# Altium PCB Copy of Breakout pcb.PcbDoc
Units mil, origin at the board's own origin, x right, y up, seen from the top; angles counter-clockwise.
Board outline 2910 x 1805 mil, 4 copper layers (Top Layer 1, Top Layer, Bottom Layer, Bottom Layer 1), stack 23.756 mil thick; 2 components, 34 nets, 72 pads, 16 vias.
Unrouted connection lines stored in the file: 16.
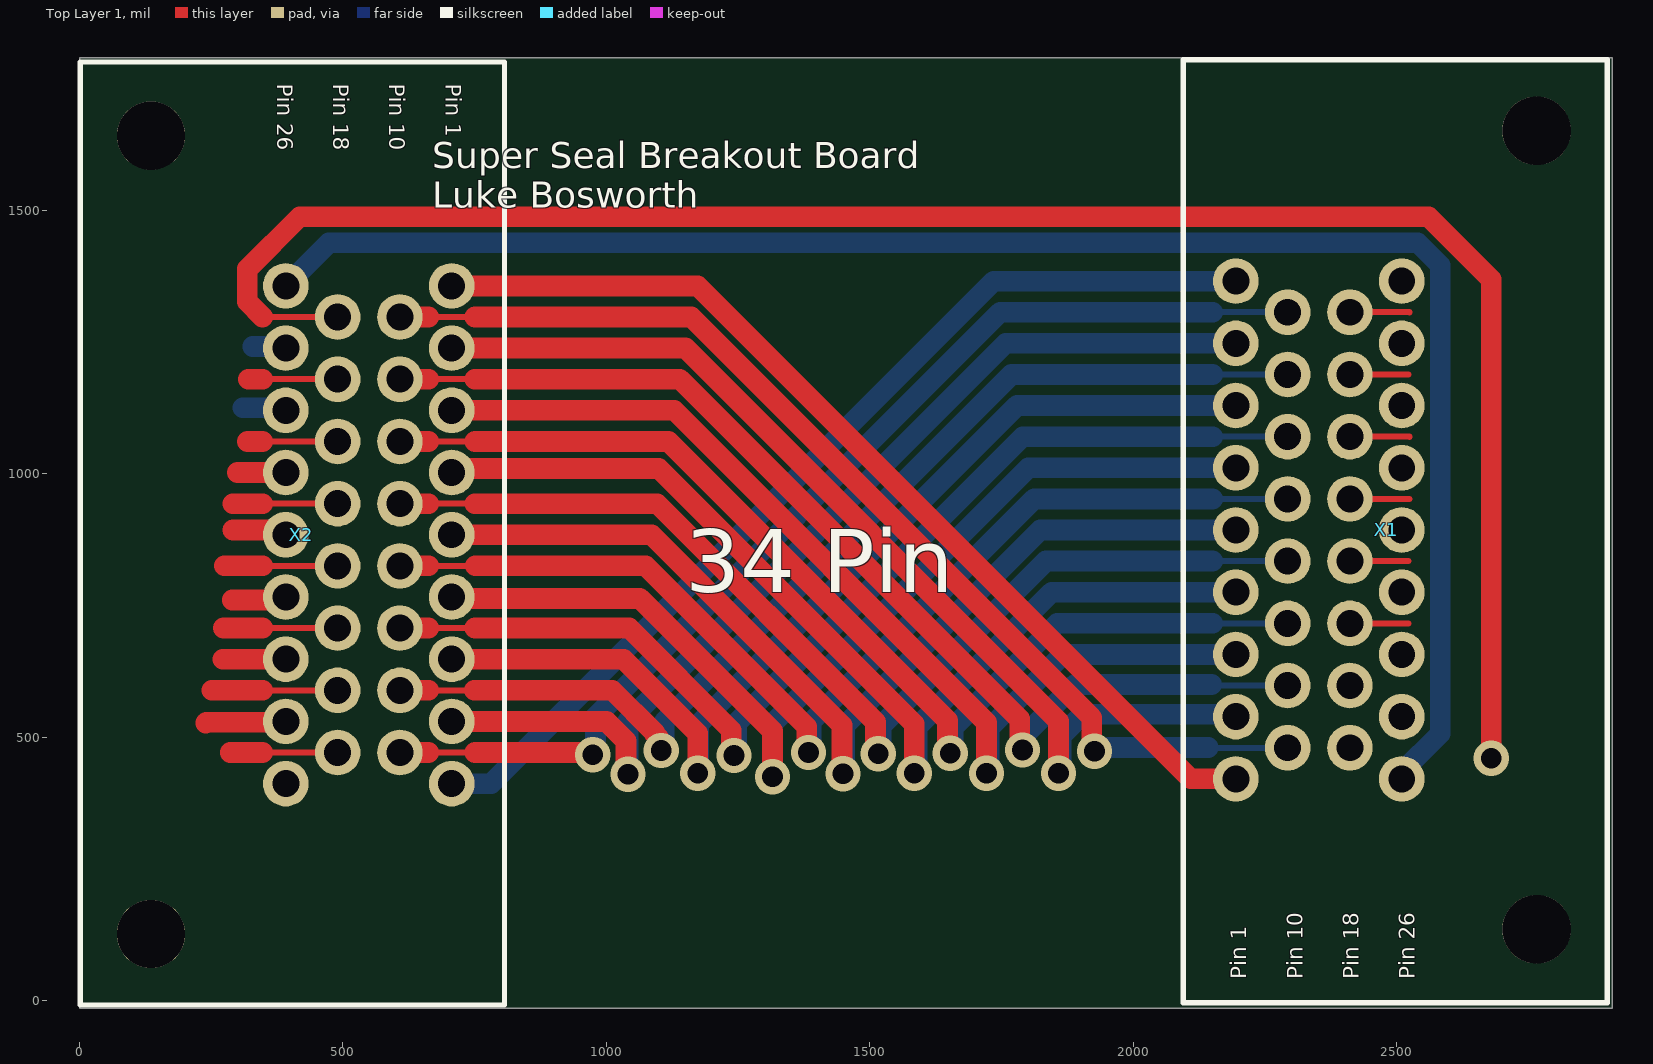
[diagram p0: Top Layer 1 view]
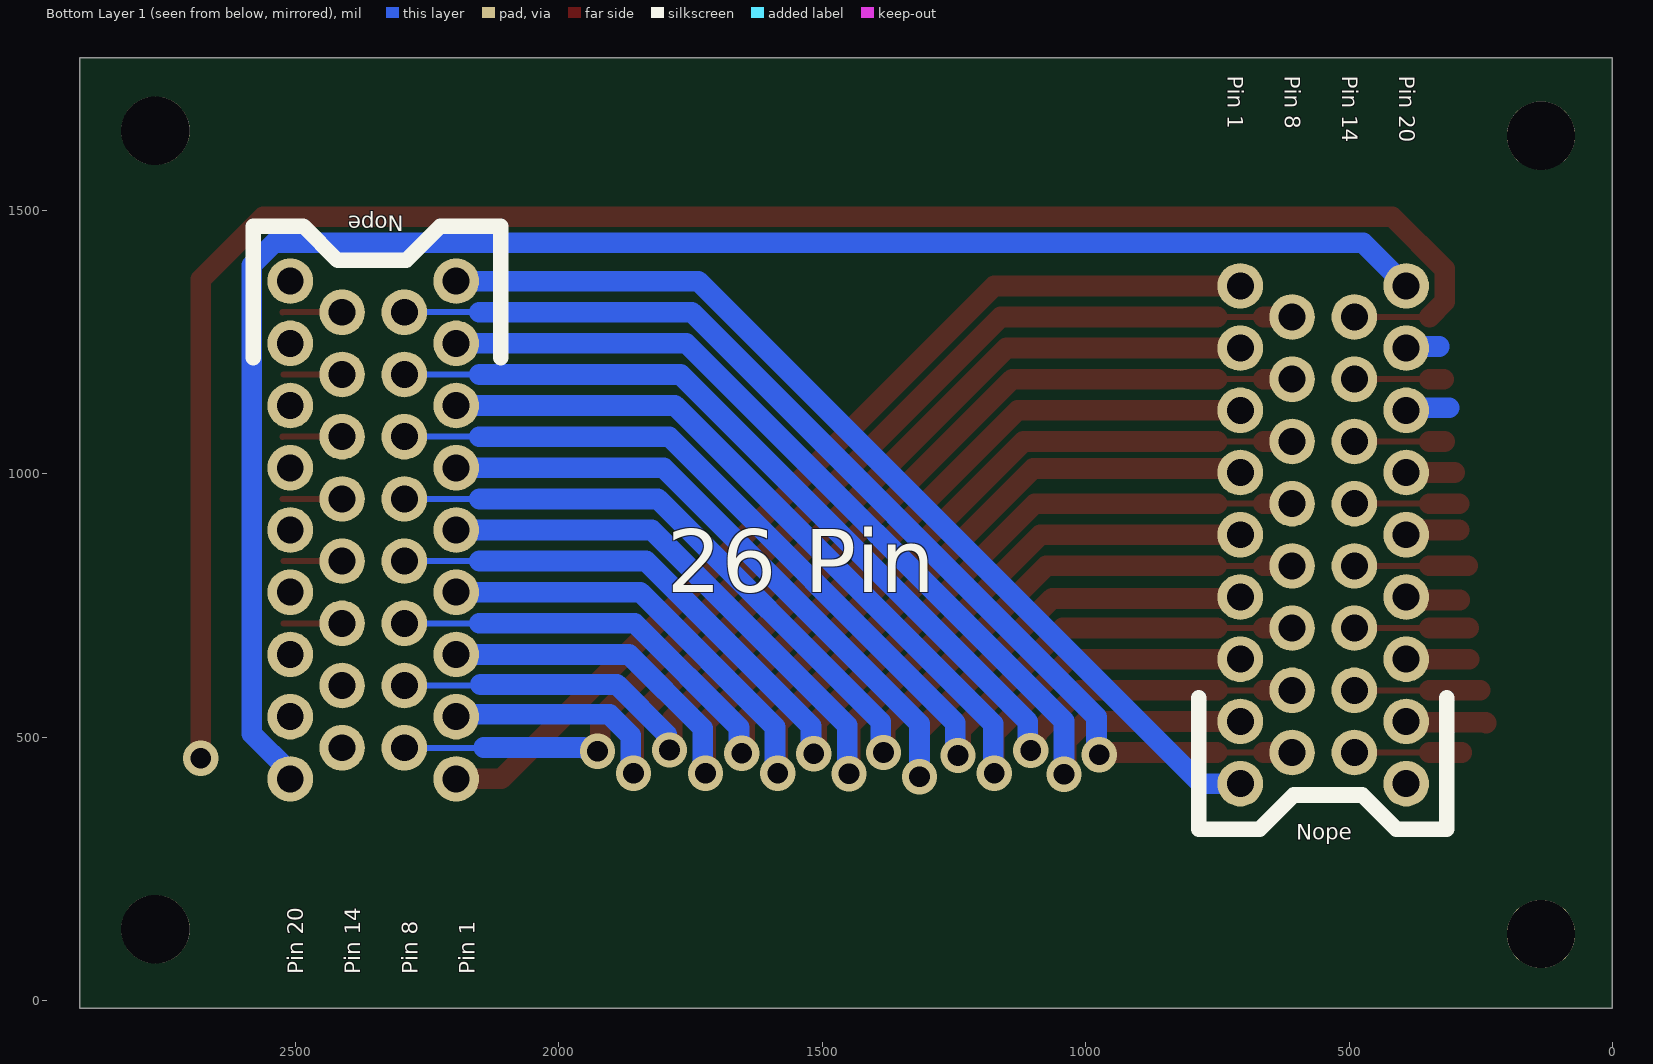
[diagram p1: Bottom Layer 1 view, seen from below]

## Layer stack, top to bottom
Top Solder: solder mask 0.4, Solder Resist, Dk 3.5
Top Layer 1: signal copper 1.378
Dielectric 2: prepreg 2.8, PP-006, Dk 4.1
Top Layer: signal copper 1.4
Dielectric 1: dielectric 12.6, FR-4, Dk 4.8
Bottom Layer: signal copper 1.4
Dielectric 3: prepreg 2.8, PP-006, Dk 4.1
Bottom Layer 1: signal copper 1.378
Bottom Solder: solder mask 0.4, Solder Resist, Dk 3.5

## Board outline
0,-15 2910,-15 2910,1790 0,1790

## Design rules (kind name [scope] priority, off if disabled: settings)
Clearance [All] p1: gap=10 ignorepadtopadclearanceinfootprint=FALSE except(0: Arc-Hole Track-Hole SMDPad-Hole THPad-Hole Via-Hole Fill-Hole Poly-Hole Region-Hole Text-Hole)
Height [All] p1: minheight=0 maxheight=1500 prefheight=500
HoleSize [All] p1: absolutevalues=TRUE maxlimit=150 minlimit=11.81 maxpercent=80.000 minpercent=20.000
PolygonConnect [All] p1: connectstyle=Relief reliefconductorwidth=10 reliefentries=4 polygonreliefangle="90 Angle" airgapwidth=10
RoutingVias [All] p1: holewidth=11.81 width=19.68 viastyle="Through Hole" minholewidth=11.81 minwidth=19.68 maxholewidth=78.74 maxwidth=78.74
SolderMaskExpansion [All] p1: expansion=4 istentingtop=FALSE
Width [All] p1: maxlimit=39.37 minlimit=5 preferedwidth=15
28 further rules are at their usual default settings.

## Components (designator, comment, footprint, x,y, rotation, side; value= is the part's Value field where it differs from the comment)
X1 "6437288-1" 6437288-1 2195.04,420.67 r90 top
X2 "6437288-1" 6437288-1 706.54,1356.5 r270 top

## Footprints (in the part's own frame and the unit in brackets; to place one, negate y for a bottom-side part, rotate by r counter-clockwise, add the part's x,y. Pads: shape width x height; smd on the part's side, far side on the other; paste and mask are expansions set on the pad)
6437288-1 [mm]
  round 2.2 hole 1.3: A1(0,0) A2(3,0) A3(6,0) A4(9,0) A5(12,0) A6(15,0) A7(18,0) A8(21,0) A9(24,0) A10(1.5,-2.5) A11(4.5,-2.5) A12(7.5,-2.5) A13(10.5,-2.5) A14(13.5,-2.5) A15(16.5,-2.5) A16(19.5,-2.5) A17(22.5,-2.5) A18(1.5,-5.5) A19(4.5,-5.5) A20(7.5,-5.5) A21(10.5,-5.5) A22(13.5,-5.5) A23(16.5,-5.5) A24(19.5,-5.5) A25(22.5,-5.5) A26(0,-8) A27(3,-8) A28(6,-8) A29(9,-8) A30(12,-8) A31(15,-8) A32(18,-8) A33(21,-8) A34(24,-8)
  round 3.3 hole 3.3 unplated: MH(-7.25,-14.5) MH(31.25,-14.5)
  silkscreen extent -10.79,-17.91 34.67,2.54, body extent -10.75,-34 34.75,2.5, height 28.16

## Part data
X1 X2: "Superseal 34P", Circuits=34, ComponentLink1Description=Digikey, ComponentLink1URL=https://www.digikey.com/products/en?mpart=6437288-1&&csp=WT.z_cid%3Dsp_8004_20120425_buynow%26TE_cid%3D8004-1541898693362, Name=6437288-1

## Via types
v1: diameter 66.93, hole 39.37, Top Layer 1 to Bottom Layer 1, tented both sides, 16 vias

## Nets (pads, with @x,y where several pads share a name; then routed paths per layer and width w, separated by ;. In a path a pad name is that pad's centre, name@x,y a point inside that pad or via, vN(x,y) a via of type N, cw(c..) or ccw(c..) an arc to the next point about the centre after c; other vN are vias at no path point)
NetX1_A1: X1.A1 X2.A1 | length 1876.1
  Top Layer 1 w39.37: X2.A1 1173.5,1356.5 2109.33,420.67 X1.A1
NetX1_A2: X1.A2 X2.A2 | length 1967.6
  Top Layer 1 w39.37: X2.A2 1150.35,1238.39 1858.53,530.21 v1(1858.53,431.45)
  Bottom Layer 1 w39.37: v1(1858.53,431.45) 1863.8,436.72 1863.8,503.11 1903.84,543.15 2190.67,543.15 X1.A2
NetX1_A3: X1.A3 X2.A3 | length 1970.4
  Top Layer 1 w39.37: X2.A3 1128.82,1120.28 1721.49,527.61 v1(1721.49,431.45)
  Bottom Layer 1 w39.37: v1(1721.49,431.45) 1726.76,436.72 1726.76,516.76 1866.89,656.89 X1.A3
NetX1_A4: X1.A4 X2.A4 | length 1976.9
  Top Layer 1 w39.37: X2.A4 714.37,1010 1099.46,1010 1584.45,525.01 v1(1584.45,431.45)
  Bottom Layer 1 w39.37: v1(1584.45,431.45) 1589.72,436.72 1589.72,519.36 1845.36,775 X1.A4
NetX1_A5: X1.A5 X2.A5 | length 1972.7
  Top Layer 1 w39.37: X2.A5 1085.76,884.06 1447.33,522.49 1447.33,432.26 v1(1449.3,430.29)
  Bottom Layer 1 w39.37: v1(1449.3,430.29) 1452.68,433.68 1452.68,521.96 1823.83,893.11 X1.A5
NetX1_A6: X1.A6 X2.A6 | length 1982.3
  Top Layer 1 w39.37: X2.A6 709.44,763.04 1063.72,763.04 1315.37,511.38 v1(1315.37,424.75)
  Bottom Layer 1 w39.37: v1(1315.37,424.75) 1315.37,525.19 1801.4,1011.22 X1.A6
NetX1_A7: X1.A7 X2.A7 | length 1965
  Top Layer 1 w39.37: X2.A7 1032.63,647.83 1173.33,507.14 v1(1173.33,431.45)
  Bottom Layer 1 w39.37: v1(1173.33,431.45) 1175.41,433.53 1175.41,524.87 1779.87,1129.33 X1.A7
NetX1_A8: X1.A8 X2.A8 | length 1963.1
  Top Layer 1 w39.37: X2.A8 1000.28,529.72 1037.27,492.73 1037.27,433.34 v1(1041.38,429.24)
  Bottom Layer 1 w39.37: v1(1041.38,429.24) 1041.38,530.48 1758.34,1247.44 X1.A8
NetX1_A9: X1.A9 X2.A9 | length 1883.6
  Bottom Layer 1 w39.37: X2.A9 781.61,411.61 1735.55,1365.55 X1.A9
NetX1_A10: X1.A10 X2.A10 | length 2063.8
  Top Layer 1 w11.4: 662.36,1297.44 730,1297.44 750.71,1297.44
  Top Layer 1 w39.37: X2.A10 662.36,1297.44 ; 750.71,1297.44 1161.12,1297.44 1921.68,536.88 1921.68,478.55 v1(1926.95,473.28)
  Bottom Layer 1 w11.4: 2142.61,480 2142.88,479.72 X1.A10
  Bottom Layer 1 w39.37: v1(1926.95,473.28) 1932.22,478.55 1951.71,478.55 1953.16,480 2142.61,480
NetX1_A11: X1.A11 X2.A11 | length 2075
  Top Layer 1 w11.4: 662.36,1179.33 750.71,1179.33
  Top Layer 1 w39.37: X2.A11 662.36,1179.33 ; 750.71,1179.33 1139.59,1179.33 1784.64,534.28 1784.64,480.75 v1(1789.91,475.48)
  Bottom Layer 1 w11.4: 2148.7,600 2150.82,597.88 2293.42,597.88 X1.A11
  Bottom Layer 1 w39.37: v1(1789.91,475.48) 1795.18,480.75 1795.18,505.18 1890,600 2148.7,600
NetX1_A12: X1.A12 X2.A12 | length 2091.4
  Top Layer 1 w11.4: 662.36,1061.22 750.71,1061.22
  Top Layer 1 w39.37: X2.A12 662.36,1061.22 ; 750.71,1061.22 1118.06,1061.22 1647.6,531.68 1647.6,474.66 v1(1652.87,469.39)
  Bottom Layer 1 w11.4: 2150.87,715.94 X1.A12
  Bottom Layer 1 w39.37: v1(1652.87,469.39) 1658.14,474.66 1658.14,517.96 1856.12,715.94 2150.87,715.94
NetX1_A13: X1.A13 X2.A13 | length 2093.8
  Top Layer 1 w11.4: 662.36,943.11 750.71,943.11
  Top Layer 1 w39.37: X2.A13 662.36,943.11 ; 750.71,943.11 1096.53,943.11 1510.98,528.66 1510.98,473.45 v1(1516.25,468.18)
  Bottom Layer 1 w11.4: 2150.87,834.05 X1.A13
  Bottom Layer 1 w39.37: v1(1516.25,468.18) 1521.52,473.45 1521.52,520.98 1834.6,834.05 2150.87,834.05
NetX1_A14: X1.A14 X2.A14 | length 2070.1
  Top Layer 1 w11.4: 682.09,825.05 750.75,825.05 751.05,825.34
  Top Layer 1 w39.37: X2.A14 662.36,825 ; 751.05,825.34 1074.66,825.34 1380.54,519.46 1380.54,473.76 v1(1383.75,470.56)
  Bottom Layer 1 w11.4: 2150.87,952.17 X1.A14
  Bottom Layer 1 w39.37: v1(1383.75,470.56) 1389.02,475.83 1389.02,529.02 1812.17,952.17 2150.87,952.17
NetX1_A15: X1.A15 X2.A15 | length 2094.7
  Top Layer 1 w11.4: 662.36,706.89 696.78,706.89 750.71,706.89
  Top Layer 1 w39.37: X2.A15 662.36,706.89 ; 750.71,706.89 1043.4,706.89 1237.25,513.04 1237.25,470.35 v1(1242.52,465.08)
  Bottom Layer 1 w11.4: 2150.87,1070.28 2150.92,1070.23 2293.42,1070.23 X1.A15
  Bottom Layer 1 w39.37: v1(1242.52,465.08) 1247.8,470.35 1247.8,527.44 1790.64,1070.28 2150.87,1070.28
NetX1_A16: X1.A16 X2.A16 | length 2069.9
  Top Layer 1 w11.4: 662.36,588.78 750,588.78
  Top Layer 1 w39.37: X2.A16 662.36,588.78 ; 750,588.78 1011.22,588.78 1091.42,508.58 1091.42,506.22 1099.25,498.39 1099.25,479.62 v1(1104.53,474.34)
  Bottom Layer 1 w11.4: 2150.87,1188.39 X1.A16
  Bottom Layer 1 w39.37: v1(1104.53,474.34) 1109.8,479.62 1109.8,529.08 1769.11,1188.39 2150.87,1188.39
NetX1_A17: X1.A17 X2.A17 | length 2073.9
  Top Layer 1 w11.4: 662.36,470.67 750.71,470.67
  Top Layer 1 w39.37: X2.A17 662.36,470.67 ; 750.71,470.67 970.02,470.67 v1(974.12,466.57)
  Bottom Layer 1 w11.4: 2150.87,1306.5 X1.A17
  Bottom Layer 1 w39.37: v1(974.12,466.57) 979.39,471.85 979.39,538.31 1747.58,1306.5 2150.87,1306.5
NetX1_A18: X1.A18 X2.A18 | length 3606.3
  Top Layer 1 w11.4: 347.4,1297.44 372.56,1297.44 X2.A18
  Top Layer 1 w39.37: 347.4,1297.44 318.58,1326.26 318.58,1388.58 417.91,1487.91 2560.68,1487.91 2680,1368.6 v1(2680,460)
NetX1_A19: X1.A19 X2.A19 | length 169.3
  Top Layer 1 w11.4: 347.4,1179.33 X2.A19
  Top Layer 1 w39.37: 320.67,1179.33 347.4,1179.33
NetX1_A20: X1.A20 X2.A20 | length 282.3
  Top Layer 1 w11.4: 347.4,1061.22 X2.A20 ; X1.A20 2522.73,715.94
  Top Layer 1 w39.37: 318.82,1061.22 347.4,1061.22
NetX1_A21: X1.A21 X2.A21 | length 309.8
  Top Layer 1 w11.4: 347.4,943.11 X2.A21 ; X1.A21 2522.73,834.06
  Top Layer 1 w39.37: 291.37,943.11 347.4,943.11
NetX1_A22: X1.A22 X2.A22 | length 328
  Top Layer 1 w11.4: 347.4,825 X2.A22 ; X1.A22 2524.57,952.17
  Top Layer 1 w39.37: 275,825 347.4,825
NetX1_A23: X1.A23 X2.A23 | length 330
  Top Layer 1 w11.4: 347.4,706.89 X2.A23 ; X1.A23 2524.34,1070.28 2524.61,1070
  Top Layer 1 w39.37: 273.11,706.89 347.4,706.89
NetX1_A24: X1.A24 X2.A24 | length 349.9
  Top Layer 1 w11.4: 347.4,588.78 X2.A24 ; X1.A24 2522.73,1188.39
  Top Layer 1 w39.37: 251.22,588.78 347.4,588.78
NetX1_A25: X1.A25 X2.A25 | length 316.8
  Top Layer 1 w11.4: 347.4,470.67 X2.A25 ; X1.A25 2524.57,1306.5 2524.61,1306.45
  Top Layer 1 w39.37: 286.28,470.67 347.4,470.67
NetX1_A26: X1.A26 X2.A26 | length 3248.5
  Bottom Layer 1 w39.37: X2.A26 473.62,1438.54 2540.23,1438.54 2582.99,1395.79 2582.99,552.81 2582.99,506.45 2510,433.45 X1.A26
NetX1_A27: X1.A27 X2.A27 | length 74.3
  Top Layer 1 w39.37: X2.A27@388.54,1241.42 X2.A27
  Bottom Layer 1 w39.37: 328.58,1241.42 X2.A27@388.54,1241.42 ; X1.A27 X1.A27@2517.11,531.67
NetX1_A28: X1.A28 X2.A28 | length 83.7
  Top Layer 1 w39.37: X2.A28@386.44,1125.41 X2.A28
  Bottom Layer 1 w39.37: 310,1125.41 X2.A28@386.44,1125.41
NetX1_A29: X1.A29 X2.A29 | length 91.9
  Top Layer 1 w39.37: 299.71,1002.17 X2.A29
NetX1_A30: X1.A30 X2.A30 | length 104
  Top Layer 1 w39.37: 291.34,893.09 382.54,893.09 X2.A30
NetX1_A31: X1.A31 X2.A31 | length 104
  Top Layer 1 w39.37: 290,760 385.63,760 X2.A31
NetX1_A32: X1.A32 X2.A32 | length 119.4
  Top Layer 1 w39.37: 272.17,647.83 X2.A32
NetX1_A33: X1.A33 X2.A33 | length 153.4
  Top Layer 1 w39.37: 239.38,526.75 240.87,528.24 390.09,528.24 X2.A33
NetX1_A34: X1.A34 X2.A34
pads on no net: X1.MH X2.MH

## Silkscreen, mask and mechanical layers (free items; w line width, h text height)
Top Overlay:
  text "Pin 26" at 375,1740 h30 r270
  text "Pin 18" at 481.67,1740 h30 r270
  text "Pin 10" at 588.33,1740 h30 r270
  text "Pin 1" at 695,1740 h30 r270
  text "Super Seal Breakout Board / Luke Bosworth" at 670,1505 h50
  text "34 Pin" at 1150,775 h120
  text "Pin 1" at 2215,40 h30 r90
  text "Pin 10" at 2321.67,40 h30 r90
  text "Pin 18" at 2428.33,40 h30 r90
  text "Pin 26" at 2535,40 h30 r90
Bottom Overlay:
  lines w29.53: 315,575 315,325 410,325 475,390 605,390 670,325 785,325 785,575 ; 2110,1220 2110,1470 2225,1470 2290,1405 2420,1405 2485,1470 2580,1470 2580,1220
  text "Pin 20" at 405,1755 h30 r90
  text "Pin 14" at 513.33,1755 h30 r90
  text "Pin 8" at 621.67,1755 h30 r90
  text "Pin 1" at 730,1755 h30 r90
  text "Nope" at 2295,1490 h30 r180
  text "26 Pin" at 1795,775 h120
  text "Nope" at 600,305 h30
  text "Pin 1" at 2160,50 h30 r270
  text "Pin 8" at 2268.33,50 h30 r270
  text "Pin 14" at 2376.67,50 h30 r270
  text "Pin 20" at 2485,50 h30 r270
Mechanical 1:
  lines w29.53: 1000,1000 1000,2805 4360,2805 4360,1000 1000,1000